# Altium PCB A1_v31.PcbDoc (part 5 of 6)
Units mil, origin at the board's own origin, x right, y up, seen from the top; angles counter-clockwise.
Board outline 3937.01 x 3149.61 mil, 2 copper layers (Top Layer, Bottom Layer); 94 components, 93 nets, 325 pads, 43 vias.
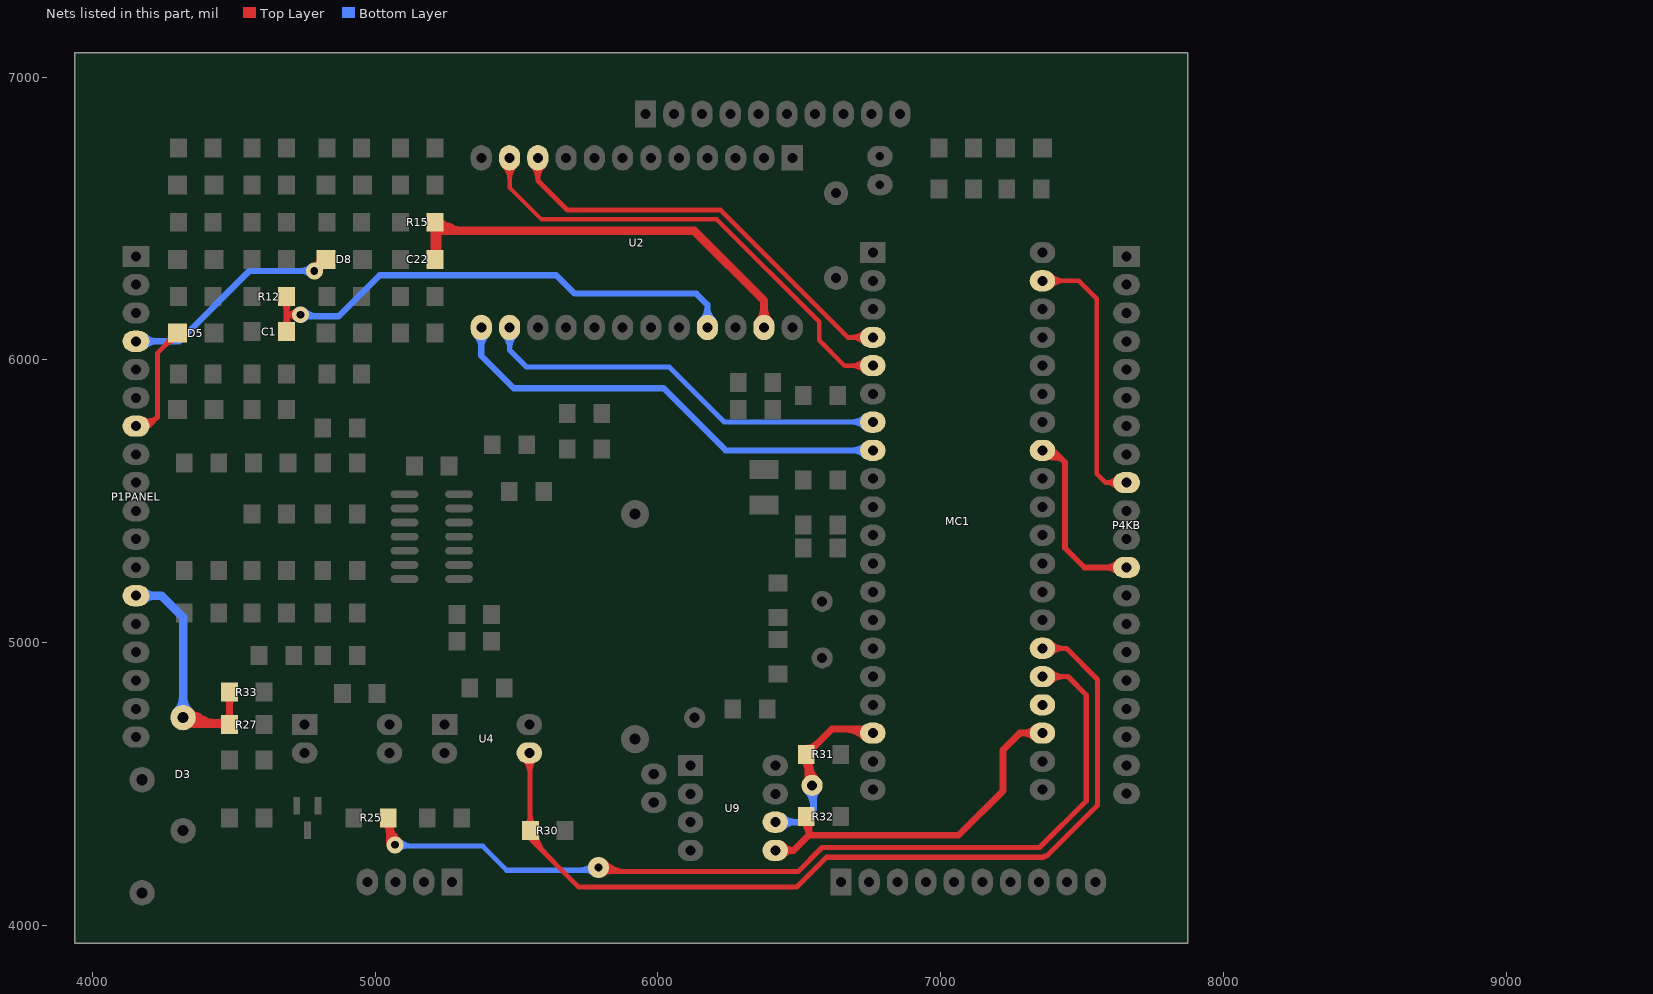
[diagram p5: the nets of this part, all layers, seen from the top]

## Via types
v1: diameter 60, hole 28, Top Layer to Bottom Layer, 30 vias
v2: diameter 90, hole 35.43, Top Layer to Bottom Layer, 6 vias
v3: diameter 75, hole 28, Top Layer to Bottom Layer, 5 vias
v4: diameter 75, hole 35.43, Top Layer to Bottom Layer, 2 vias

## Nets (pads, with @x,y where several pads share a name; then routed paths per layer and width w, separated by ;. In a path a pad name is that pad's centre, name@x,y a point inside that pad or via, vN(x,y) a via of type N, cw(c..) or ccw(c..) an arc to the next point about the centre after c; other vN are vias at no path point) (continued)
RC6: MC1.25 R25.1 | length 5572.3
  Top Layer w18: v1(5070,4285) 5070,4280 5046.02,4303.98 ; v3(5790,4205) 5810,4205 5825,4190 6495,4190 6580,4275 7350,4275 7515,4440 7515,4815 7450,4880 MC1.25@7360,4880 ; v3@5805,4180 cw(c5829.51,4155.49) 5829.51,4190.15 ; v3@5812.93,4212.42 ccw(c5855,4254.49) 5855,4195 ; v3@5815,4220 ccw(c5887.79,4292.79) 5887.79,4189.85 ; R25.1@5031.51,4361.55 cw(c4996.47,4326.51) 5046.02,4326.51 ; R25.1@5031.51,4361.55 cw(c4996.47,4326.51) 5046.02,4326.51 ; R25.1@5031.51,4361.55 cw(c4996.47,4326.51) 5046.02,4326.51 ; R25.1@5036.1,4358.1 cw(c5012.01,4314.5) 5060.12,4327.39 ; R25.1@5036.1,4358.1 cw(c5012.01,4314.5) 5060.12,4327.39 ; R25.1@5036.1,4358.1 cw(c5012.01,4314.5) 5060.12,4327.39 ; 5046.02,4303.96 ccw(c5085.53,4303.96) v1@5060.49,4273.4 ; 5046.02,4303.96 ccw(c5085.53,4303.96) v1@5060.49,4273.4 ; 5046.02,4303.96 ccw(c5085.53,4303.96) v1@5060.49,4273.4 ; 5046.02,4303.98 cw(c5036.03,4293.98) v1@5049.7,4290.37 ; 5046.02,4303.98 ccw(c5053.14,4311.09) v1@5058.6,4302.64 ; 5046.02,4303.98 ccw(c5053.14,4311.09) v1@5058.6,4302.64 ; 5046.02,4303.98 cw(c5036.03,4293.98) v1@5049.7,4290.37 ; 5046.02,4303.98 ccw(c5053.14,4311.09) v1@5058.6,4302.64 ; 5046.02,4303.98 cw(c5036.03,4293.98) v1@5049.7,4290.37 ; 5046.02,4303.98 R25.1@5046.02,4380 ; 5046.02,4326.51 cw(c5095.58,4326.51) R25.1@5060.54,4361.55 ; 5046.02,4326.51 cw(c5095.58,4326.51) R25.1@5060.54,4361.55 ; 5046.02,4326.51 cw(c5095.58,4326.51) R25.1@5060.54,4361.55 ; 5046.02,4341.98 ccw(c5116.68,4341.98) v1@5071.9,4287.32 ; 5046.02,4341.98 ccw(c5116.68,4341.98) v1@5071.9,4287.32 ; 5046.02,4341.98 ccw(c5116.68,4341.98) v1@5071.9,4287.32 ; R25.1@5046.02,4380 ccw(c5147.83,4380) v1@5083.31,4301.24 ; R25.1@5046.02,4380 ccw(c5147.83,4380) v1@5083.31,4301.24 ; R25.1@5046.02,4380 ccw(c5147.83,4380) v1@5083.31,4301.24 ; 5051.14,4316.24 cw(c5036.01,4305.38) v1@5051.99,4295.8 ; 5051.14,4316.24 ccw(c5071.12,4330.58) v1@5070.52,4305.99 ; 5051.14,4316.24 cw(c5036.01,4305.38) v1@5051.99,4295.8 ; 5051.14,4316.24 ccw(c5071.12,4330.58) v1@5070.52,4305.99 ; 5051.14,4316.24 ccw(c5071.12,4330.58) v1@5070.52,4305.99 ; 5051.14,4316.24 cw(c5036.01,4305.38) v1@5051.99,4295.8 ; v1@5054.39,4299.05 ccw(c5030.99,4320.12) 5056.57,4338.49 ; v1@5054.39,4299.05 ccw(c5030.99,4320.12) 5056.57,4338.49 ; v1@5054.39,4299.05 ccw(c5030.99,4320.12) 5056.57,4338.49 ; 5059.2,4330.83 cw(c5103.71,4342.76) R25.1@5063.8,4365.8 ; 5059.2,4330.83 cw(c5103.71,4342.76) R25.1@5063.8,4365.8 ; 5059.2,4330.83 cw(c5103.71,4342.76) R25.1@5063.8,4365.8 ; v1@5067.77,4287.01 ccw(c5048,4304.81) 5069.61,4320.33 ; v1@5067.77,4287.01 ccw(c5048,4304.81) 5069.61,4320.33 ; v1@5067.77,4287.01 ccw(c5048,4304.81) 5069.61,4320.33 ; MC1.25@7387.65,4859.85 cw(c7436.31,4811.19) 7436.31,4880 ; MC1.25@7387.65,4859.85 cw(c7436.31,4811.19) 7436.31,4880 ; MC1.25@7387.65,4859.85 cw(c7436.31,4811.19) 7436.31,4880 ; MC1.25@7387.65,4900.15 ccw(c7436.31,4948.81) 7436.31,4880 ; MC1.25@7387.65,4900.15 ccw(c7436.31,4948.81) 7436.31,4880 ; MC1.25@7387.65,4900.15 ccw(c7436.31,4948.81) 7436.31,4880
  Bottom Layer w18: v1(5070,4285) 5070,4280 5380,4280 5465,4195 v3@5790,4195 ; 5714.28,4194.85 ccw(c5714.28,4280.72) v3@5775,4220 ; 5738.42,4195.15 cw(c5738.42,4143.42) v3@5775,4180 ; v1@5084.85,4270.15 cw(c5108.63,4246.37) 5108.63,4280 ; v1@5084.85,4270.15 cw(c5108.63,4246.37) 5108.63,4280 ; v1@5084.85,4270.15 cw(c5108.63,4246.37) 5108.63,4280 ; v1@5084.85,4299.85 ccw(c5132.77,4347.77) 5132.77,4280 ; v1@5084.85,4299.85 ccw(c5132.77,4347.77) 5132.77,4280 ; v1@5084.85,4299.85 ccw(c5132.77,4347.77) 5132.77,4280
RC7: MC1.26 R30.1 U4.3 | length 4053.2
  Top Layer w18: R30.1@5534.46,4353.45 ccw(c5501.89,4386.02) 5547.95,4386.02 ; U4.3@5545,4610 5547.95,4607.05 5547.95,4307.05 5720,4135 6490,4135 6596,4241 7364.08,4241 7368.08,4245 7375,4245 7555,4425 7555,4870 7445,4980 MC1.26@7360,4980 ; 5547.95,4390.97 ccw(c5601.01,4390.97) R30.1@5563.49,4353.45 ; R30.1@5551.5,4331.06 ccw(c5618.05,4331.06) 5571,4284 ; R30.1@5569.5,4331.06 ccw(c5679.51,4331.06) 5601.72,4253.28 ; U4.3@5524.85,4589.85 cw(c5469.07,4534.07) 5547.95,4534.07 ; U4.3@5524.85,4589.85 cw(c5469.07,4534.07) 5547.95,4534.07 ; U4.3@5524.85,4589.85 cw(c5469.07,4534.07) 5547.95,4534.07 ; 5547.95,4548.32 cw(c5606.68,4548.32) U4.3@5565.15,4589.85 ; 5547.95,4548.32 cw(c5606.68,4548.32) U4.3@5565.15,4589.85 ; 5547.95,4548.32 cw(c5606.68,4548.32) U4.3@5565.15,4589.85 ; MC1.26@7387.65,4959.85 cw(c7436.31,4911.19) 7436.31,4980 ; MC1.26@7387.65,4959.85 cw(c7436.31,4911.19) 7436.31,4980 ; MC1.26@7387.65,4959.85 cw(c7436.31,4911.19) 7436.31,4980 ; MC1.26@7387.65,5000.15 ccw(c7436.31,5048.81) 7436.31,4980 ; MC1.26@7387.65,5000.15 ccw(c7436.31,5048.81) 7436.31,4980 ; MC1.26@7387.65,5000.15 ccw(c7436.31,5048.81) 7436.31,4980
REMOT: C1.2 R12.2 U2.21 | length 2954.4
  Top Layer w22: C1.2@4686.02,6100 4686.02,6160 ; R12.2@4686.02,6224.43 4686.02,6160 ; v1(4735,6160) 4686.02,6160 ; C1.2@4672.92,6117.04 ccw(c4641.29,6148.67) 4686.02,6148.67 ; C1.2@4672.92,6117.04 ccw(c4641.29,6148.67) 4686.02,6148.67 ; C1.2@4672.92,6117.04 ccw(c4641.29,6148.67) 4686.02,6148.67 ; R12.2@4672.92,6207.39 cw(c4641.29,6175.76) 4686.02,6175.76 ; R12.2@4672.92,6207.39 cw(c4641.29,6175.76) 4686.02,6175.76 ; R12.2@4672.92,6207.39 cw(c4641.29,6175.76) 4686.02,6175.76 ; 4686.02,6148.67 ccw(c4730.75,6148.67) C1.2@4699.12,6117.04 ; 4686.02,6148.67 ccw(c4730.75,6148.67) C1.2@4699.12,6117.04 ; 4686.02,6148.67 ccw(c4730.75,6148.67) C1.2@4699.12,6117.04 ; 4686.02,6175.76 cw(c4730.75,6175.76) R12.2@4699.12,6207.39 ; 4686.02,6175.76 cw(c4730.75,6175.76) R12.2@4699.12,6207.39 ; 4686.02,6175.76 cw(c4730.75,6175.76) R12.2@4699.12,6207.39 ; 4689.13,6160 cw(c4689.13,6114.13) v1@4721.56,6146.56 ; 4689.13,6160 ccw(c4689.13,6205.87) v1@4721.56,6173.44 ; 4689.13,6160 ccw(c4689.13,6205.87) v1@4721.56,6173.44 ; 4689.13,6160 cw(c4689.13,6114.13) v1@4721.56,6146.56 ; 4689.13,6160 ccw(c4689.13,6205.87) v1@4721.56,6173.44 ; 4689.13,6160 cw(c4689.13,6114.13) v1@4721.56,6146.56
  Bottom Layer w22: v1(4735,6160) 4740,6155 4870,6155 5015,6300 5640,6300 5705,6235 6135,6235 6175,6195 U2.21@6175,6115 ; v1@4748.44,6146.56 cw(c4768.8,6126.2) 4768.8,6155 ; v1@4748.44,6146.56 cw(c4768.8,6126.2) 4768.8,6155 ; v1@4748.44,6146.56 cw(c4768.8,6126.2) 4768.8,6155 ; v1@4748.44,6173.44 ccw(c4792.94,6217.94) 4792.94,6155 ; v1@4748.44,6173.44 ccw(c4792.94,6217.94) 4792.94,6155 ; v1@4748.44,6173.44 ccw(c4792.94,6217.94) 4792.94,6155 ; U2.21@6156.26,6141.24 ccw(c6111.02,6186.48) 6175,6186.48 ; U2.21@6156.26,6141.24 ccw(c6111.02,6186.48) 6175,6186.48 ; U2.21@6156.26,6141.24 ccw(c6111.02,6186.48) 6175,6186.48 ; 6175,6186.48 ccw(c6238.98,6186.48) U2.21@6193.74,6141.24 ; 6175,6186.48 ccw(c6238.98,6186.48) U2.21@6193.74,6141.24 ; 6175,6186.48 ccw(c6238.98,6186.48) U2.21@6193.74,6141.24
REMOTIN: D5.2 P1PANEL.7 | length 611.1
  Top Layer w18: P1PANEL.7@4153.54,5766.14 4198.14,5766.14 4229,5797 ; P1PANEL.7@4168.91,5775.17 ccw(c4187.26,5806.01) 4212.63,5780.63 ; P1PANEL.7@4178.11,5790.64 ccw(c4199.47,5826.53) 4229,5797 ; D5.2@4275.58,6095 cw(c4216.51,6095) 4258.28,6053.24 cw(c4300.04,6011.47) D5.2@4300.04,6070.54 ; D5.2@4300.04,6095 4229,6023.96 4229,5797
RESET: MC1.33 P4KB.12 | length 1358.6
  Top Layer w20: MC1.33@7360,5680 7398,5680 7440,5638 ; P4KB.12@7657.48,5266.14 7508.86,5266.14 7440,5335 7440,5638 ; MC1.33@7359.04,5670.79 ccw(c7399.98,5715.36) 7402.55,5654.9 ; MC1.33@7359.04,5670.79 ccw(c7399.98,5715.36) 7402.55,5654.9 ; MC1.33@7359.04,5670.79 ccw(c7399.98,5715.36) 7402.55,5654.9 ; MC1.33@7369.75,5672.84 cw(c7383.71,5628.38) 7416.66,5661.34 ; MC1.33@7369.75,5672.84 cw(c7383.71,5628.38) 7416.66,5661.34 ; MC1.33@7369.75,5672.84 cw(c7383.71,5628.38) 7416.66,5661.34 ; MC1.33@7375.74,5653.76 cw(c7394.87,5592.87) 7440,5638 ; MC1.33@7375.74,5653.76 cw(c7394.87,5592.87) 7440,5638 ; MC1.33@7375.74,5653.76 cw(c7394.87,5592.87) 7440,5638 ; 7581.09,5266.14 cw(c7581.09,5199.75) 7628.03,5246.7 ccw(c7581.09,5199.75) 7581.09,5266.14 ; 7581.09,5266.14 ccw(c7581.09,5332.53) 7628.03,5285.59 cw(c7581.09,5332.53) 7581.09,5266.14
RSTART: C22.2 R15.2 U2.23 | length 3236.4
  Top Layer w30: R15.2@5211.02,6487.21 C22.2@5211.02,6355.82 5220,6364.79 5220,6457 6128,6457 6375,6210 U2.23@6375,6115 ; R15.2@5225.15,6486.67 ccw(c5243.15,6490.99) 5244.99,6472.58 ; R15.2@5200.08,6472.33 ccw(c5237.1,6509.35) R15.2@5237.1,6457 ; R15.2@5200.08,6472.33 ccw(c5237.1,6509.35) R15.2@5237.1,6457 ; R15.2@5200.08,6472.33 ccw(c5237.1,6509.35) R15.2@5237.1,6457 ; C22.2@5200.75,6370.03 ccw(c5175.95,6394.83) 5211.02,6394.83 ; C22.2@5200.75,6370.03 ccw(c5154.28,6416.5) 5220,6416.5 ; C22.2@5200.75,6370.03 ccw(c5154.28,6416.5) 5220,6416.5 ; C22.2@5200.75,6370.03 ccw(c5175.95,6394.83) 5211.02,6394.83 ; C22.2@5200.75,6370.03 ccw(c5154.28,6416.5) 5220,6416.5 ; C22.2@5200.75,6370.03 ccw(c5175.95,6394.83) 5211.02,6394.83 ; R15.2@5200.75,6473 cw(c5175.95,6448.2) 5211.02,6448.2 ; R15.2@5200.75,6473 cw(c5154.28,6426.53) 5220,6426.53 ; R15.2@5200.75,6473 cw(c5154.28,6426.53) 5220,6426.53 ; R15.2@5200.75,6473 cw(c5175.95,6448.2) 5211.02,6448.2 ; R15.2@5200.75,6473 cw(c5154.28,6426.53) 5220,6426.53 ; R15.2@5200.75,6473 cw(c5175.95,6448.2) 5211.02,6448.2 ; 5211.02,6394.83 ccw(c5246.1,6394.83) C22.2@5221.3,6370.03 ; 5211.02,6394.83 ccw(c5246.1,6394.83) C22.2@5221.3,6370.03 ; 5211.02,6394.83 ccw(c5246.1,6394.83) C22.2@5221.3,6370.03 ; 5211.02,6448.2 cw(c5246.1,6448.2) R15.2@5221.3,6473 ; 5211.02,6448.2 cw(c5246.1,6448.2) R15.2@5221.3,6473 ; 5211.02,6448.2 cw(c5246.1,6448.2) R15.2@5221.3,6473 ; 5213.71,6392.47 ccw(c5226.85,6384.89) C22.2@5218.76,6372.05 ; 5213.71,6392.47 ccw(c5226.85,6384.89) C22.2@5218.76,6372.05 ; 5213.71,6392.47 ccw(c5226.85,6384.89) C22.2@5218.76,6372.05 ; 5213.71,6450.56 cw(c5226.85,6458.14) R15.2@5218.76,6470.98 ; 5213.71,6450.56 cw(c5226.85,6458.14) R15.2@5218.76,6470.98 ; 5213.71,6450.56 cw(c5226.85,6458.14) R15.2@5218.76,6470.98 ; R15.2@5216.17,6469.69 cw(c5238.57,6410.49) 5270.21,6465.3 ; R15.2@5216.17,6469.69 cw(c5238.57,6410.49) 5270.21,6465.3 ; R15.2@5216.17,6469.69 cw(c5238.57,6410.49) 5270.21,6465.3 ; R15.2@5221.3,6493.55 ccw(c5309.53,6581.78) 5309.53,6457 ; R15.2@5221.3,6493.55 ccw(c5309.53,6581.78) 5309.53,6457 ; R15.2@5221.3,6493.55 ccw(c5309.53,6581.78) 5309.53,6457 ; U2.23@6359.09,6138.41 ccw(c6320.68,6176.82) 6375,6176.82 ; U2.23@6359.09,6138.41 ccw(c6320.68,6176.82) 6375,6176.82 ; U2.23@6359.09,6138.41 ccw(c6320.68,6176.82) 6375,6176.82 ; 6375,6176.82 ccw(c6429.32,6176.82) U2.23@6390.91,6138.41 ; 6375,6176.82 ccw(c6429.32,6176.82) U2.23@6390.91,6138.41 ; 6375,6176.82 ccw(c6429.32,6176.82) U2.23@6390.91,6138.41
RSTARTIN: D8.2 P1PANEL.4 | length 2560
  Top Layer w22: v1(4784.22,6315) D8.2@4825.04,6355.82 ; D8.2@4802.58,6355.74 cw(c4773.13,6355.64) 4787.85,6330.14 cw(c4808.28,6294.77) D8.2@4819.09,6334.16 ; D8.2@4803.38,6349.87 cw(c4763.99,6339.05) 4799.36,6318.63 cw(c4824.87,6303.91) D8.2@4824.96,6333.35 ; v1@4781.28,6315.6 cw(c4811.44,6309.43) D8.2@4803.47,6339.16 ; v1@4781.28,6315.6 cw(c4811.44,6309.43) D8.2@4803.47,6339.16 ; v1@4781.28,6315.6 cw(c4811.44,6309.43) D8.2@4803.47,6339.16 ; v1@4784.22,6334 ccw(c4784.22,6379.87) D8.2@4816.66,6347.44 ; v1@4784.22,6334 ccw(c4784.22,6379.87) D8.2@4816.66,6347.44 ; v1@4784.22,6334 ccw(c4784.22,6379.87) D8.2@4816.66,6347.44 ; v1@4784.82,6312.06 ccw(c4778.65,6342.21) D8.2@4808.38,6334.25 ; v1@4784.82,6312.06 ccw(c4778.65,6342.21) D8.2@4808.38,6334.25 ; v1@4784.82,6312.06 ccw(c4778.65,6342.21) D8.2@4808.38,6334.25 ; v1@4785.49,6333.96 ccw(c4786.59,6350.54) D8.2@4800.99,6342.23 ; v1@4785.49,6333.96 ccw(c4786.59,6350.54) D8.2@4800.99,6342.23 ; v1@4785.49,6333.96 ccw(c4786.59,6350.54) D8.2@4800.99,6342.23 ; v1@4785.49,6333.96 ccw(c4786.59,6350.54) D8.2@4800.99,6342.23 ; v1@4785.49,6333.96 ccw(c4786.59,6350.54) D8.2@4800.99,6342.23 ; v1@4785.49,6333.96 ccw(c4786.59,6350.54) D8.2@4800.99,6342.23 ; v1@4786.69,6317.47 cw(c4825.04,6279.12) D8.2@4825.04,6333.35 ; v1@4786.69,6317.47 ccw(c4748.34,6355.82) D8.2@4802.58,6355.82 ; v1@4786.69,6317.47 ccw(c4748.34,6355.82) D8.2@4802.58,6355.82 ; v1@4786.69,6317.47 cw(c4825.04,6279.12) D8.2@4825.04,6333.35 ; v1@4786.69,6317.47 ccw(c4748.34,6355.82) D8.2@4802.58,6355.82 ; v1@4786.69,6317.47 cw(c4825.04,6279.12) D8.2@4825.04,6333.35 ; D8.2@4793.44,6331.61 ccw(c4802.31,6347.6) D8.2@4811.45,6331.77 ; D8.2@4793.44,6331.61 ccw(c4802.31,6347.6) D8.2@4811.45,6331.77 ; D8.2@4793.44,6331.61 ccw(c4802.31,6347.6) D8.2@4811.45,6331.77 ; D8.2@4793.44,6331.61 ccw(c4802.31,6347.6) D8.2@4811.45,6331.77 ; D8.2@4793.44,6331.61 ccw(c4802.31,6347.6) D8.2@4811.45,6331.77 ; D8.2@4793.44,6331.61 ccw(c4802.31,6347.6) D8.2@4811.45,6331.77 ; D8.2@4800.84,6324.22 cw(c4816.82,6333.09) D8.2@4800.99,6342.23 ; D8.2@4800.84,6324.22 cw(c4816.82,6333.09) D8.2@4800.99,6342.23 ; D8.2@4800.84,6324.22 cw(c4816.82,6333.09) D8.2@4800.99,6342.23 ; D8.2@4800.84,6324.22 cw(c4816.82,6333.09) D8.2@4800.99,6342.23 ; D8.2@4800.84,6324.22 cw(c4816.82,6333.09) D8.2@4800.99,6342.23 ; D8.2@4800.84,6324.22 cw(c4816.82,6333.09) D8.2@4800.99,6342.23 ; v1@4803.22,6315 cw(c4849.09,6315) D8.2@4816.66,6347.44 ; v1@4803.22,6315 cw(c4849.09,6315) D8.2@4816.66,6347.44 ; v1@4803.22,6315 cw(c4849.09,6315) D8.2@4816.66,6347.44 ; v1@4803.18,6316.26 cw(c4819.77,6317.37) D8.2@4811.45,6331.77 ; v1@4803.18,6316.26 cw(c4819.77,6317.37) D8.2@4811.45,6331.77 ; v1@4803.18,6316.26 cw(c4819.77,6317.37) D8.2@4811.45,6331.77 ; v1@4803.18,6316.26 cw(c4819.77,6317.37) D8.2@4811.45,6331.77 ; v1@4803.18,6316.26 cw(c4819.77,6317.37) D8.2@4811.45,6331.77 ; v1@4803.18,6316.26 cw(c4819.77,6317.37) D8.2@4811.45,6331.77
  Bottom Layer w22: P1PANEL.4@4153.54,6066.14 4306.14,6066.14 4555,6315 v1(4784.22,6315) ; P1PANEL.4@4182.28,6047.4 cw(c4227.52,6002.17) 4227.52,6066.14 ; P1PANEL.4@4182.28,6047.4 cw(c4227.52,6002.17) 4227.52,6066.14 ; P1PANEL.4@4182.28,6047.4 cw(c4227.52,6002.17) 4227.52,6066.14 ; P1PANEL.4@4182.28,6084.88 ccw(c4227.52,6130.12) 4227.52,6066.14 ; P1PANEL.4@4182.28,6084.88 ccw(c4227.52,6130.12) 4227.52,6066.14 ; P1PANEL.4@4182.28,6084.88 ccw(c4227.52,6130.12) 4227.52,6066.14 ; 4738.35,6315 cw(c4738.35,6269.13) v1@4770.79,6301.56 ; 4738.35,6315 ccw(c4738.35,6360.87) v1@4770.79,6328.44 ; 4738.35,6315 ccw(c4738.35,6360.87) v1@4770.79,6328.44 ; 4738.35,6315 cw(c4738.35,6269.13) v1@4770.79,6301.56 ; 4738.35,6315 ccw(c4738.35,6360.87) v1@4770.79,6328.44 ; 4738.35,6315 cw(c4738.35,6269.13) v1@4770.79,6301.56
S0: MC1.4 U2.10 | length 2178.4
  Top Layer w18: U2.10@5575,6750 U2.10@5575,6715 5575,6635 5680,6530 6221.67,6530 6671.67,6080 MC1.4@6760,6080 ; U2.10@5554.85,6687.35 cw(c5506.19,6638.69) 5575,6638.69 ; U2.10@5554.85,6687.35 cw(c5506.19,6638.69) 5575,6638.69 ; U2.10@5554.85,6687.35 cw(c5506.19,6638.69) 5575,6638.69 ; 5575,6638.69 cw(c5643.81,6638.69) U2.10@5595.15,6687.35 ; 5575,6638.69 cw(c5643.81,6638.69) U2.10@5595.15,6687.35 ; 5575,6638.69 cw(c5643.81,6638.69) U2.10@5595.15,6687.35 ; 6683.69,6080 cw(c6683.69,6011.19) MC1.4@6732.35,6059.85 ; 6683.69,6080 ccw(c6683.69,6148.81) MC1.4@6732.35,6100.15 ; 6683.69,6080 ccw(c6683.69,6148.81) MC1.4@6732.35,6100.15 ; 6683.69,6080 cw(c6683.69,6011.19) MC1.4@6732.35,6059.85 ; 6683.69,6080 ccw(c6683.69,6148.81) MC1.4@6732.35,6100.15 ; 6683.69,6080 cw(c6683.69,6011.19) MC1.4@6732.35,6059.85
S1: MC1.5 U2.11 | length 2395.3
  Top Layer w16: U2.11@5475,6750 U2.11@5475,6715 5475,6610 5588,6497 6208,6497 6570,6135 6570,6070 6660,5980 MC1.5@6760,5980 ; U2.11@5454.14,6686.64 cw(c5403.78,6636.28) 5475,6636.28 ; U2.11@5454.14,6686.64 cw(c5403.78,6636.28) 5475,6636.28 ; U2.11@5454.14,6686.64 cw(c5403.78,6636.28) 5475,6636.28 ; 5475,6636.28 cw(c5546.22,6636.28) U2.11@5495.86,6686.64 ; 5475,6636.28 cw(c5546.22,6636.28) U2.11@5495.86,6686.64 ; 5475,6636.28 cw(c5546.22,6636.28) U2.11@5495.86,6686.64 ; 6681.28,5980 cw(c6681.28,5908.78) MC1.5@6731.64,5959.14 ; 6681.28,5980 ccw(c6681.28,6051.22) MC1.5@6731.64,6000.86 ; 6681.28,5980 ccw(c6681.28,6051.22) MC1.5@6731.64,6000.86 ; 6681.28,5980 cw(c6681.28,5908.78) MC1.5@6731.64,5959.14 ; 6681.28,5980 ccw(c6681.28,6051.22) MC1.5@6731.64,6000.86 ; 6681.28,5980 cw(c6681.28,5908.78) MC1.5@6731.64,5959.14
S2: MC1.7 U2.14 | length 2119.1
  Bottom Layer w18: U2.14@5475,6115 5475,6035 5535,5975 6040,5975 6234,5781 6759,5781 MC1.7@6760,5780 ; U2.14@5454.85,6087.35 cw(c5406.19,6038.69) 5475,6038.69 ; U2.14@5454.85,6087.35 cw(c5406.19,6038.69) 5475,6038.69 ; U2.14@5454.85,6087.35 cw(c5406.19,6038.69) 5475,6038.69 ; 5475,6038.69 cw(c5543.81,6038.69) U2.14@5495.15,6087.35 ; 5475,6038.69 cw(c5543.81,6038.69) U2.14@5495.15,6087.35 ; 5475,6038.69 cw(c5543.81,6038.69) U2.14@5495.15,6087.35 ; 6681.28,5781 cw(c6681.28,5708.78) MC1.7@6732.35,5759.85 ; 6681.28,5781 cw(c6681.28,5708.78) MC1.7@6732.35,5759.85 ; 6681.28,5781 cw(c6681.28,5708.78) MC1.7@6732.35,5759.85 ; 6686.11,5781 ccw(c6686.11,5846.39) MC1.7@6732.35,5800.15 ; 6686.11,5781 ccw(c6686.11,5846.39) MC1.7@6732.35,5800.15 ; 6686.11,5781 ccw(c6686.11,5846.39) MC1.7@6732.35,5800.15
S3: MC1.8 U2.13 | length 2226.7
  Bottom Layer w22: U2.13@5375,6115 5375,6015 5490,5900 6020,5900 6240,5680 MC1.8@6760,5680 ; U2.13@5356.26,6088.76 cw(c5311.02,6043.52) 5375,6043.52 ; U2.13@5356.26,6088.76 cw(c5311.02,6043.52) 5375,6043.52 ; U2.13@5356.26,6088.76 cw(c5311.02,6043.52) 5375,6043.52 ; 5375,6043.52 cw(c5438.98,6043.52) U2.13@5393.74,6088.76 ; 5375,6043.52 cw(c5438.98,6043.52) U2.13@5393.74,6088.76 ; 5375,6043.52 cw(c5438.98,6043.52) U2.13@5393.74,6088.76 ; 6688.52,5680 cw(c6688.52,5616.02) MC1.8@6733.76,5661.26 ; 6688.52,5680 ccw(c6688.52,5743.98) MC1.8@6733.76,5698.74 ; 6688.52,5680 ccw(c6688.52,5743.98) MC1.8@6733.76,5698.74 ; 6688.52,5680 cw(c6688.52,5616.02) MC1.8@6733.76,5661.26 ; 6688.52,5680 ccw(c6688.52,5743.98) MC1.8@6733.76,5698.74 ; 6688.52,5680 cw(c6688.52,5616.02) MC1.8@6733.76,5661.26
SCL: MC1.18 pad.0@6545,4495 R31.2 U9.6 | length 1325.3
  Top Layer w24: R31.2@6511.58,4588.67 cw(c6467.12,4544.21) 6530,4544.21 ; R31.2@6515.21,4585.88 cw(c6487.78,4538.38) 6540.77,4552.57 ; R31.2@6523.98,4626.46 ccw(c6523.98,4680.76) 6562.37,4642.37 ; 6530,4534.83 ccw(c6584.83,4534.83) pad.0@6546.06,4496.06 ; R31.2@6530,4592.78 ccw(c6642.78,4592.78) pad.0@6563.03,4513.03 ; 6536.18,4569.71 cw(c6564.94,4577.41) R31.2@6539.16,4592.3 ; R31.2@6541.5,4608.94 cw(c6571.84,4608.94) R31.2@6550.39,4630.39 ; pad.0@6545,4495 6530,4510 6530,4610 6615,4695 6745,4695 MC1.18@6760,4680 ; 6654.72,4695 cw(c6654.72,4582.22) MC1.18@6734.47,4661.97 ; 6712.67,4695 cw(c6712.67,4640.17) MC1.18@6751.44,4678.94
  Bottom Layer w24: U9.6@6415,4365 6505,4365 6550,4410 pad.0@6550,4510 ; U9.6@6440.53,4346.97 cw(c6484.06,4303.44) 6484.06,4365 cw(c6484.06,4426.56) U9.6@6440.53,4383.03 ; pad.0@6526.97,4476.97 cw(c6471.37,4421.37) 6550,4421.37 ; 6550,4445.51 cw(c6594.49,4445.51) pad.0@6563.03,4476.97 ; MC1.18@6720,4680 MC1.18@6760,4680
SDA: MC1.23 R32.2 U9.5 | length 1503
  Top Layer w24: U9.5@6415,4265 6480,4265 ; U9.5@6441.4,4247.88 cw(c6480,4212.93) 6480,4265 ; U9.5@6441.4,4282.12 ccw(c6480,4317.07) 6480,4265 ; R32.2@6512.09,4368.19 cw(c6465.91,4318.18) 6533.98,4318.18 ; R32.2@6533.98,4380 6533.98,4318.98 ; MC1.23@7334.47,4661.97 ccw(c7290.94,4618.44) 7290.94,4680 ccw(c7290.94,4741.56) MC1.23@7334.47,4698.03 ; MC1.23@7360,4680 7280,4680 7220,4620 7220,4475 7063.98,4318.98 6697.59,4318.98 6697.15,4318.54 6534.42,4318.54 6533.98,4318.98 ; 6480,4265 6533.98,4318.98
SPIRST: MC1.24
TIOUT: D3.2 P1PANEL.13 R27.2 R33.2 | length 2378.1
  Top Layer w24: D3.2@4320,4735 4345,4710 R27.2@4483.98,4710 4483.98,4820 R33.2@4488.98,4825 ; D3.2@4327.02,4729.37 cw(c4357.59,4704.89) 4377.17,4738.8 ; D3.2@4343.33,4758.33 ccw(c4460.02,4875.02) R27.2@4460.02,4710 ; D3.2@4345.75,4714.37 cw(c4379.65,4687.21) 4401.37,4724.83 ; 4418.43,4720.06 ccw(c4435.97,4792.57) R27.2@4474.84,4728.9 ; R27.2@4471.58,4697.61 ccw(c4441.66,4667.68) 4441.66,4710 ccw(c4441.66,4752.32) R27.2@4471.58,4722.39 ; R27.2@4471.58,4726.33 ccw(c4441.66,4756.25) 4483.98,4756.25 ccw(c4526.29,4756.25) R27.2@4496.37,4726.33 ; R33.2@4471.58,4808.67 cw(c4441.66,4778.75) 4483.98,4778.75 cw(c4526.29,4778.75) R33.2@4496.37,4808.67 ; D3.2@4326.36,4741.36 ccw(c4402.08,4817.08) 4402.08,4710 ; D3.2@4326.36,4741.36 ccw(c4402.08,4817.08) 4402.08,4710 ; D3.2@4326.36,4741.36 ccw(c4402.08,4817.08) 4402.08,4710 ; D3.2@4344,4712.35 cw(c4359.42,4697.8) 4370.02,4716.16 ; D3.2@4344,4712.35 cw(c4359.42,4697.8) 4370.02,4716.16 ; D3.2@4344,4712.35 cw(c4359.42,4697.8) 4370.02,4716.16 ; D3.2@4352.45,4741.02 ccw(c4388.2,4747.65) 4370.02,4716.16 ; D3.2@4352.45,4741.02 ccw(c4388.2,4747.65) 4370.02,4716.16 ; D3.2@4352.45,4741.02 ccw(c4388.2,4747.65) 4370.02,4716.16
  Bottom Layer w30: P1PANEL.13@4153.54,5166.14 4243.86,5166.14 4320,5090 D3.2@4320,4735 ; P1PANEL.13@4179.45,5150.23 cw(c4217.86,5111.82) 4217.86,5166.14 ; P1PANEL.13@4179.45,5150.23 cw(c4217.86,5111.82) 4217.86,5166.14 ; P1PANEL.13@4179.45,5150.23 cw(c4217.86,5111.82) 4217.86,5166.14 ; P1PANEL.13@4179.45,5182.05 ccw(c4217.86,5220.46) 4217.86,5166.14 ; P1PANEL.13@4179.45,5182.05 ccw(c4217.86,5220.46) 4217.86,5166.14 ; P1PANEL.13@4179.45,5182.05 ccw(c4217.86,5220.46) 4217.86,5166.14 ; D3.2@4298.79,4756.21 ccw(c4247.57,4807.43) 4320,4807.43 ; D3.2@4298.79,4756.21 ccw(c4247.57,4807.43) 4320,4807.43 ; D3.2@4298.79,4756.21 ccw(c4247.57,4807.43) 4320,4807.43 ; 4320,4807.43 ccw(c4392.43,4807.43) D3.2@4341.21,4756.21 ; 4320,4807.43 ccw(c4392.43,4807.43) D3.2@4341.21,4756.21 ; 4320,4807.43 ccw(c4392.43,4807.43) D3.2@4341.21,4756.21
UP: MC1.39 P4KB.9 | length 1478.4
  Top Layer w16: MC1.39@7360,6280 7489,6280 7552,6217 7552,5598 7583.86,5566.14 ; P4KB.9@7657.48,5566.14 7583.86,5566.14 ; MC1.39@7388.36,6259.14 cw(c7438.72,6208.78) 7438.72,6280 ; MC1.39@7388.36,6259.14 cw(c7438.72,6208.78) 7438.72,6280 ; MC1.39@7388.36,6259.14 cw(c7438.72,6208.78) 7438.72,6280 ; MC1.39@7388.36,6300.86 ccw(c7438.72,6351.22) 7438.72,6280 ; MC1.39@7388.36,6300.86 ccw(c7438.72,6351.22) 7438.72,6280 ; MC1.39@7388.36,6300.86 ccw(c7438.72,6351.22) 7438.72,6280 ; 7583.86,5566.14 cw(c7583.86,5512.29) 7624.96,5547.08 ccw(c7583.86,5512.29) 7583.86,5566.14 ; 7583.86,5566.14 ccw(c7583.86,5619.99) 7624.96,5585.2 cw(c7583.86,5619.99) 7583.86,5566.14